# Altium PCB SmartMCU.PcbDoc
Units mil, origin at the board's own origin, x right, y up, seen from the top; angles counter-clockwise.
Board outline 2169 x 1773 mil, 4 copper layers (Top Layer, GND layer, 3.3V layer, Bottom Layer), stack 23.756 mil thick; 88 components, 43 nets, 255 pads, 84 vias.
Unrouted connection lines stored in the file: 21.
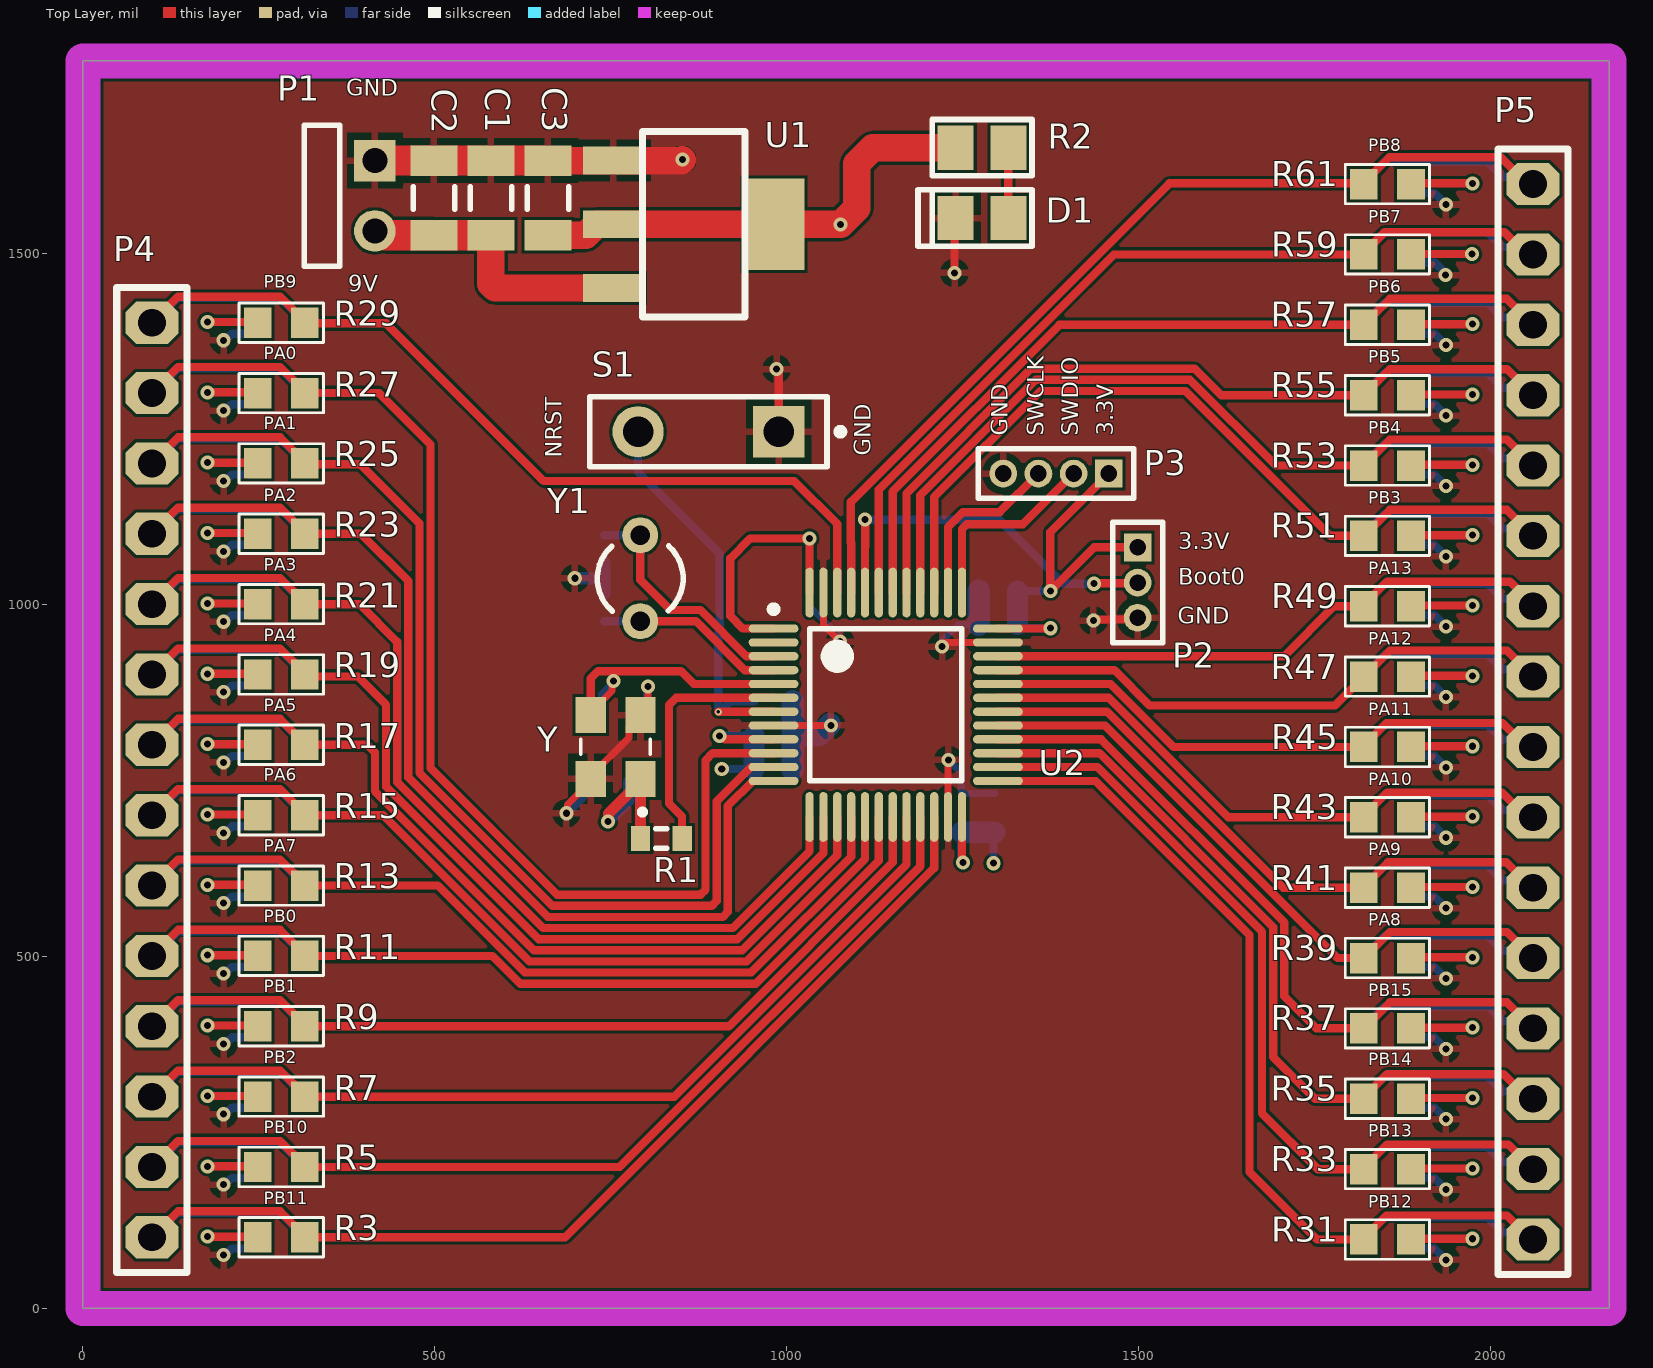
[diagram p0: Top Layer view]
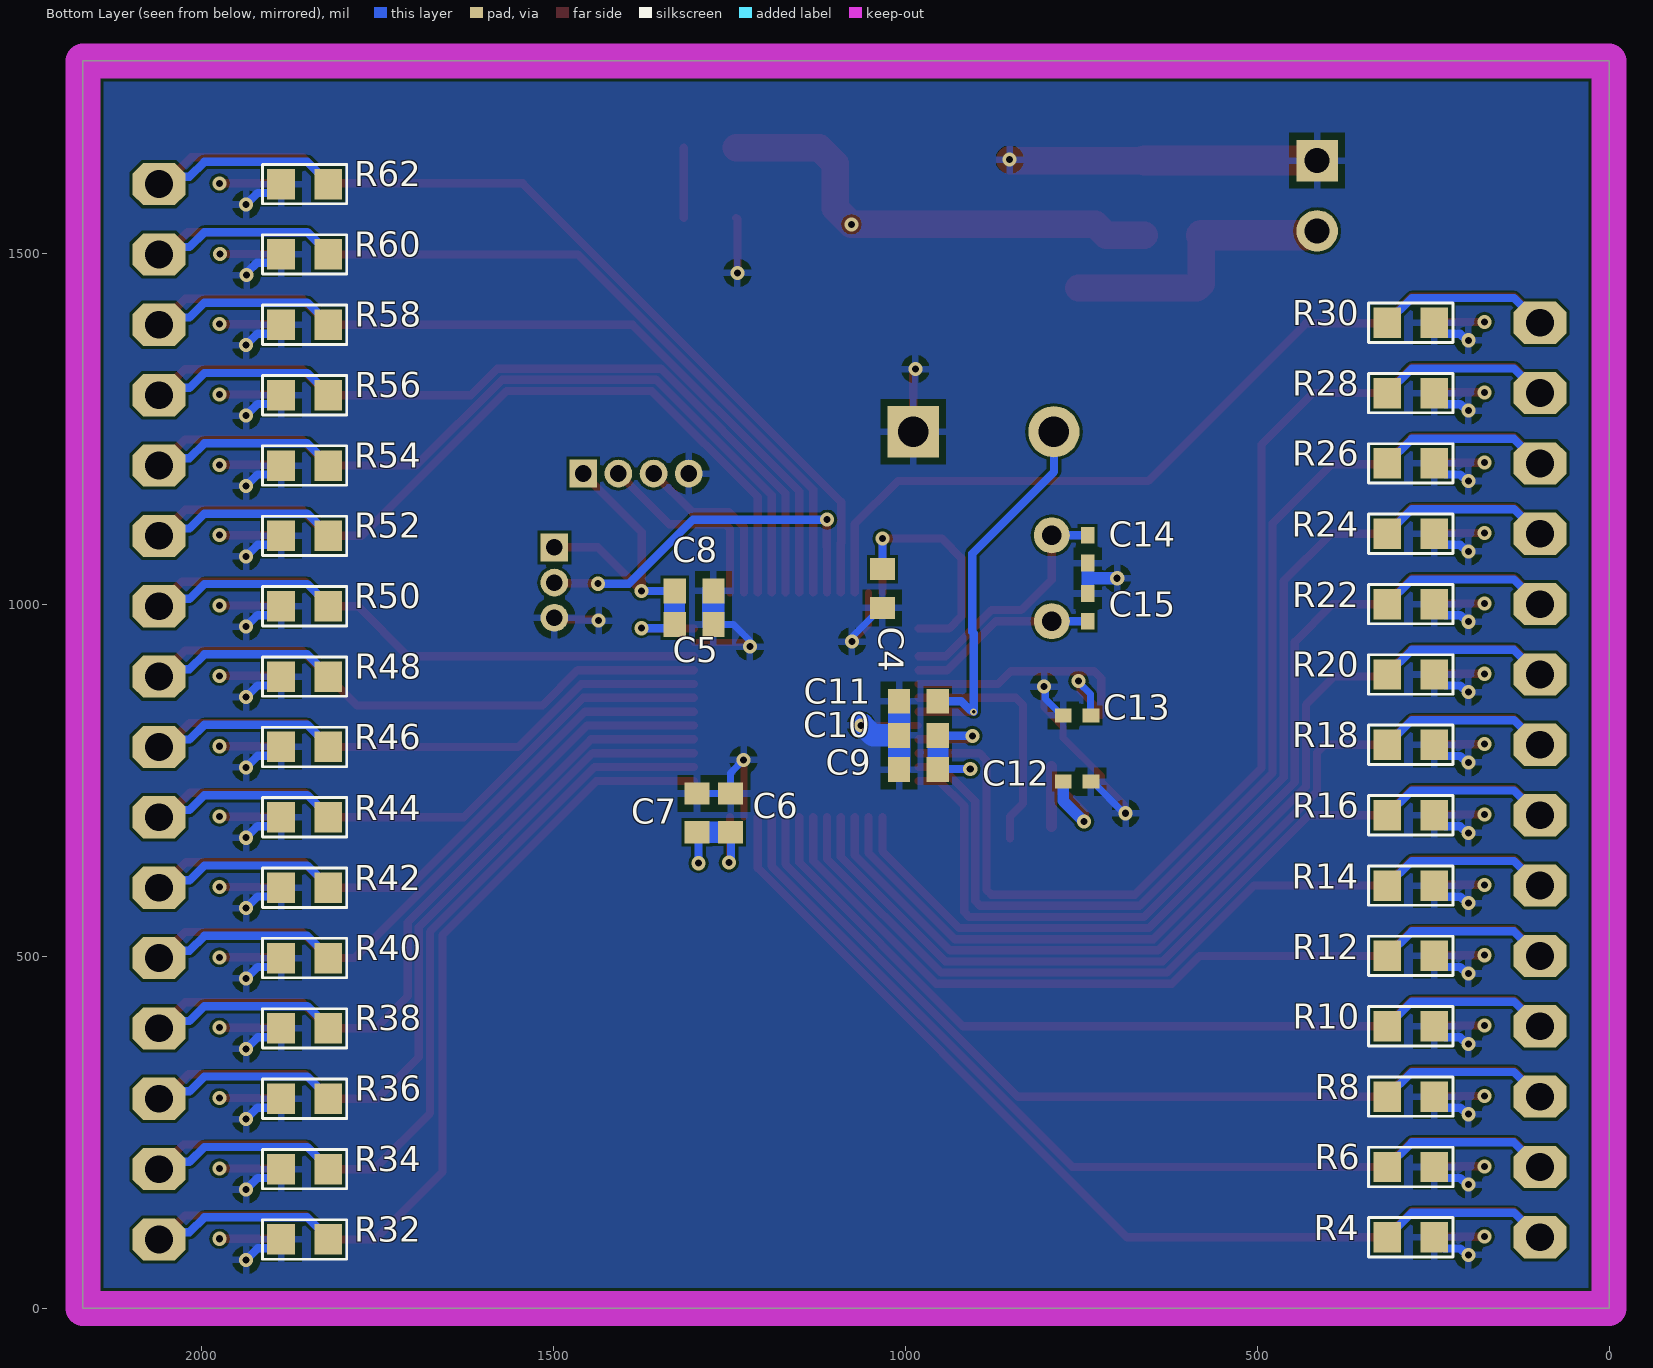
[diagram p1: Bottom Layer view, seen from below]
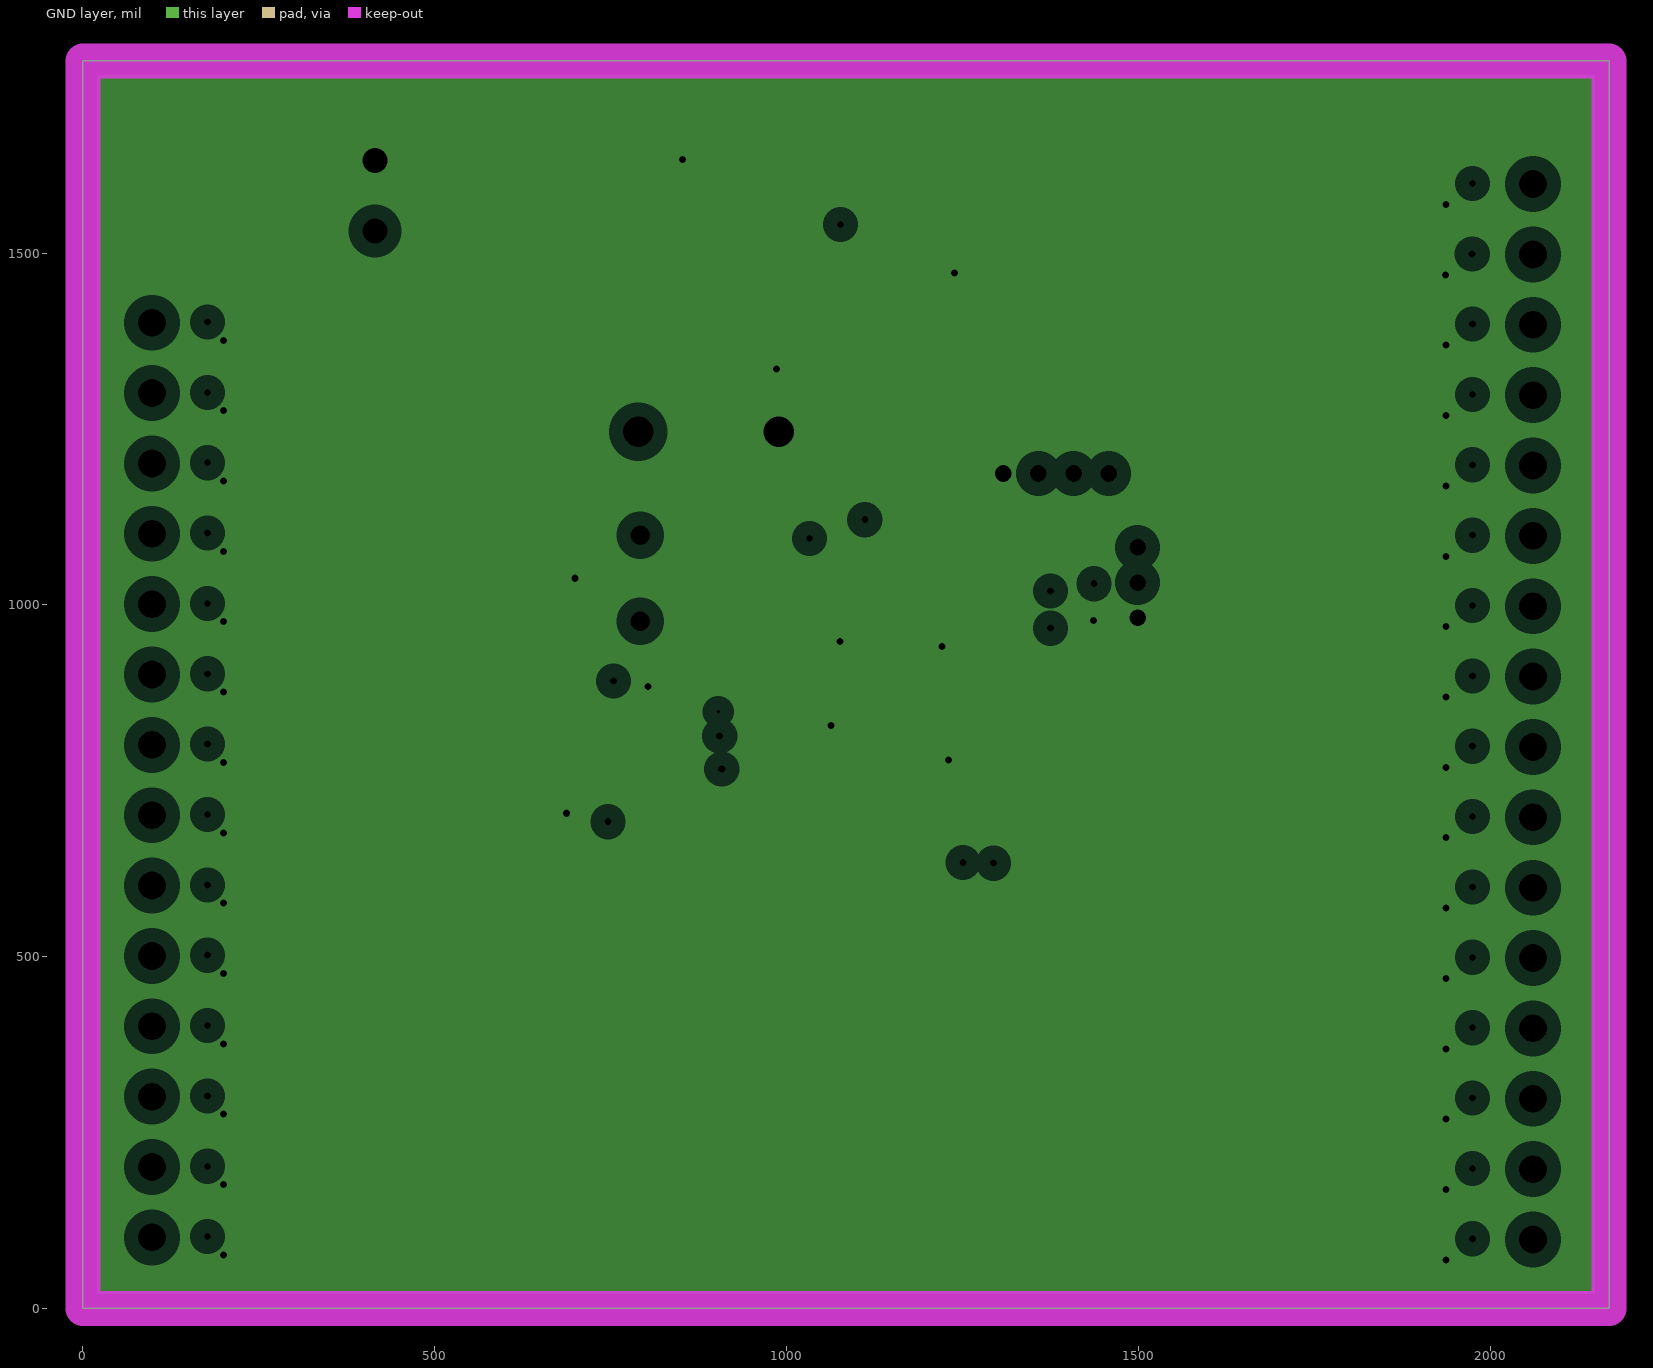
[diagram p2: GND layer, clearances drawn from the general rule]
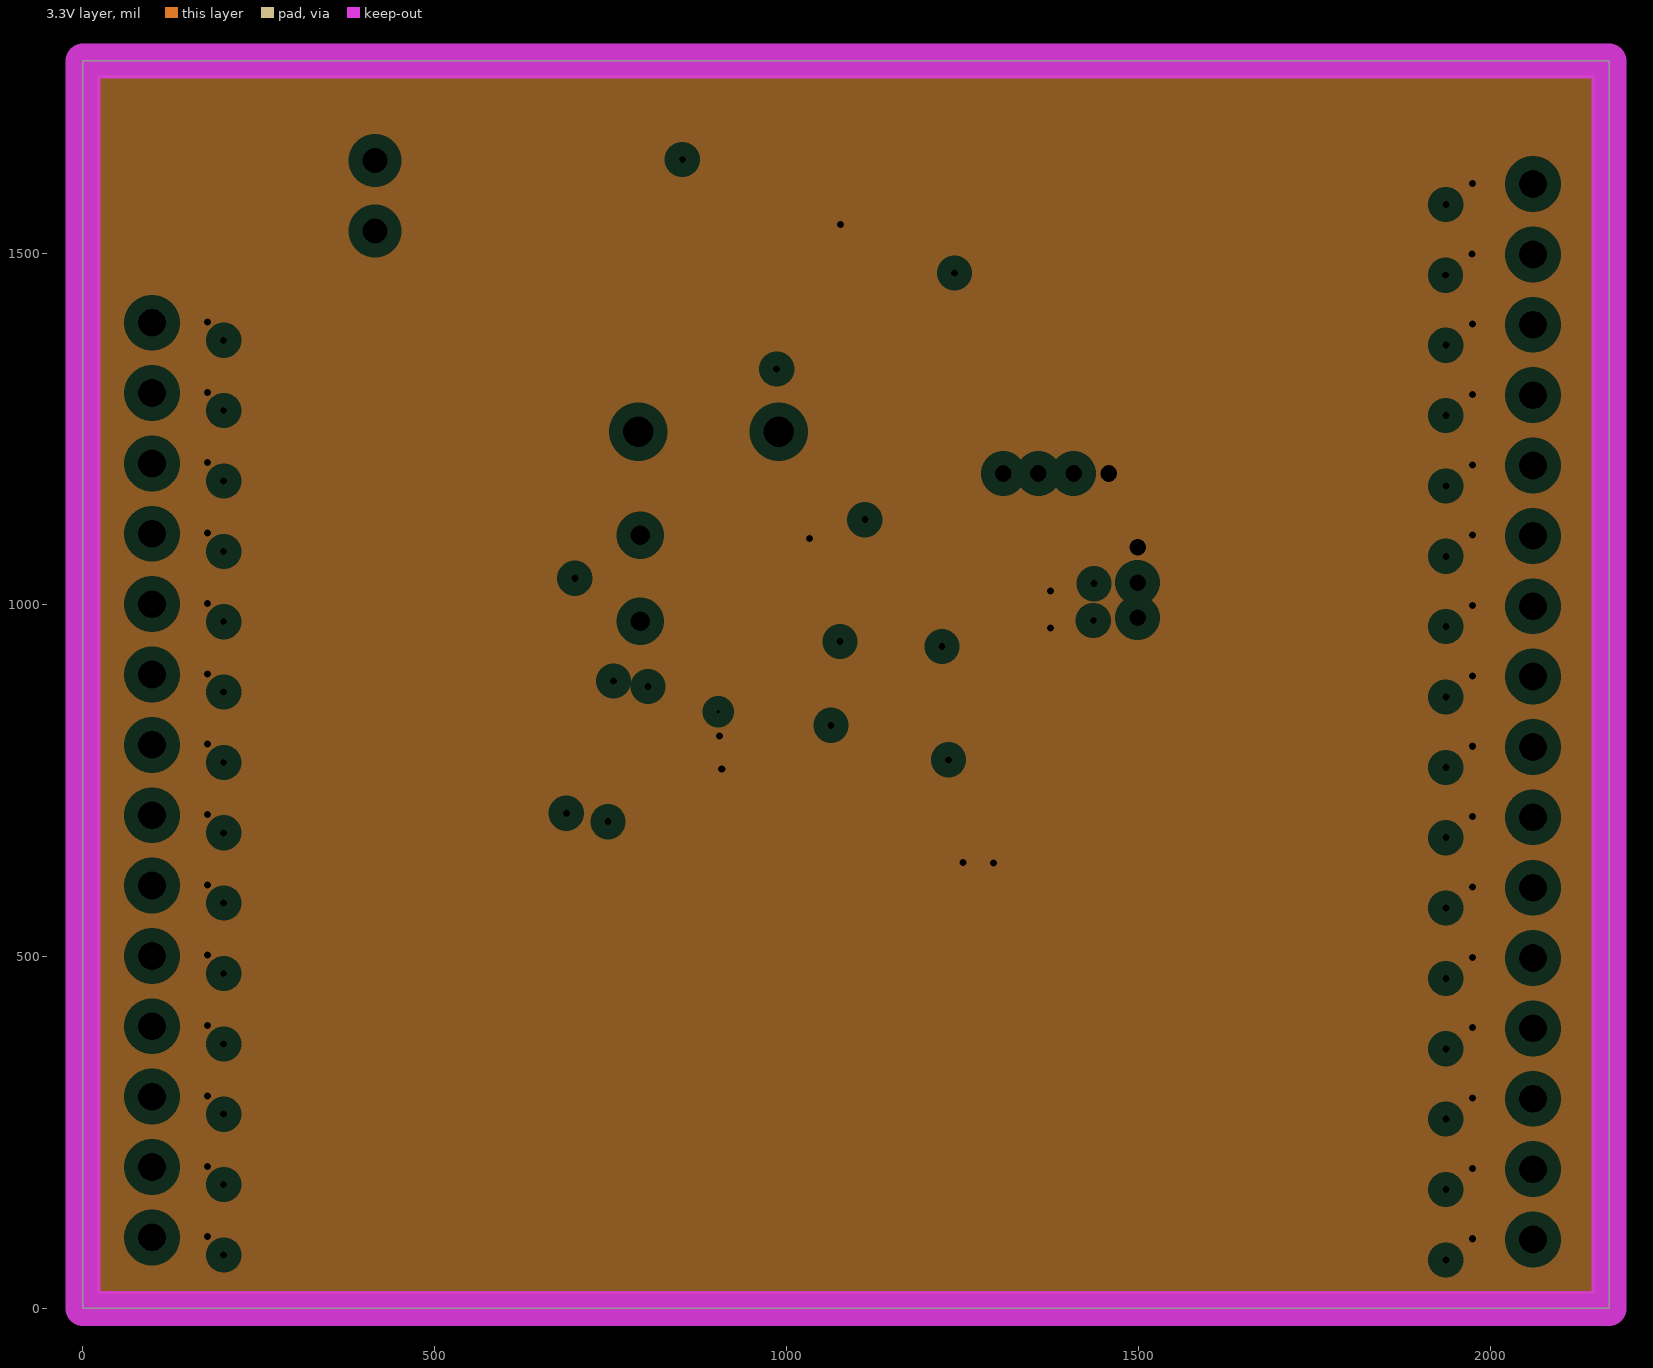
[diagram p3: 3.3V layer, clearances drawn from the general rule]
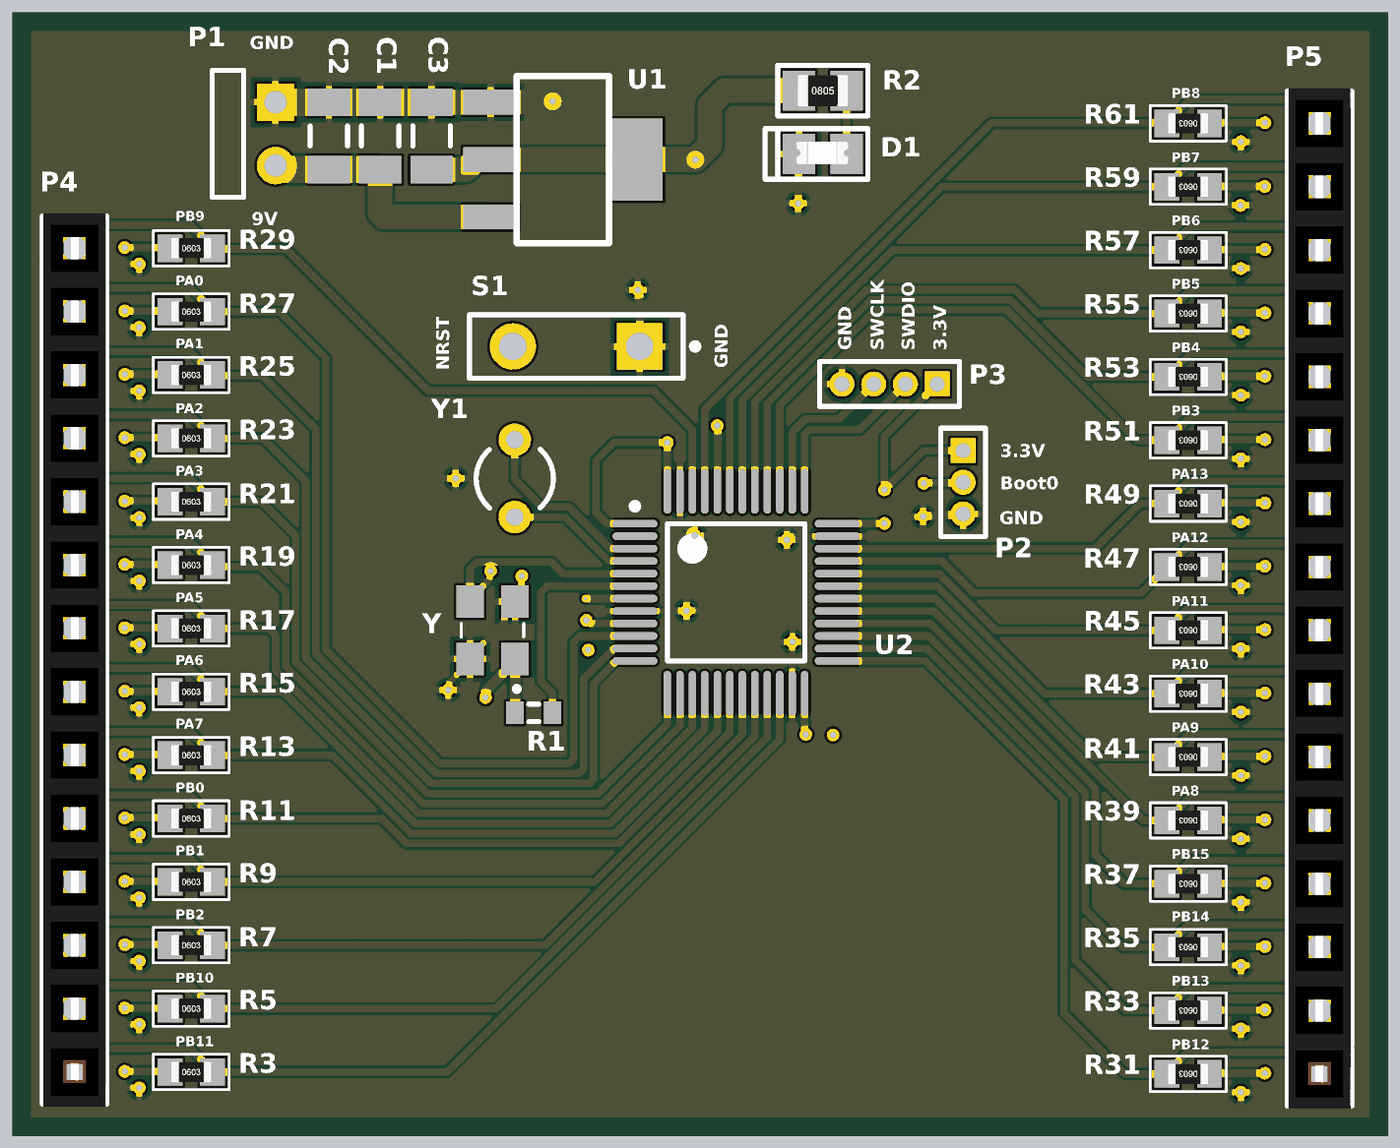
[diagram p4: 3D render of the assembled board from above, using the file's embedded part models]
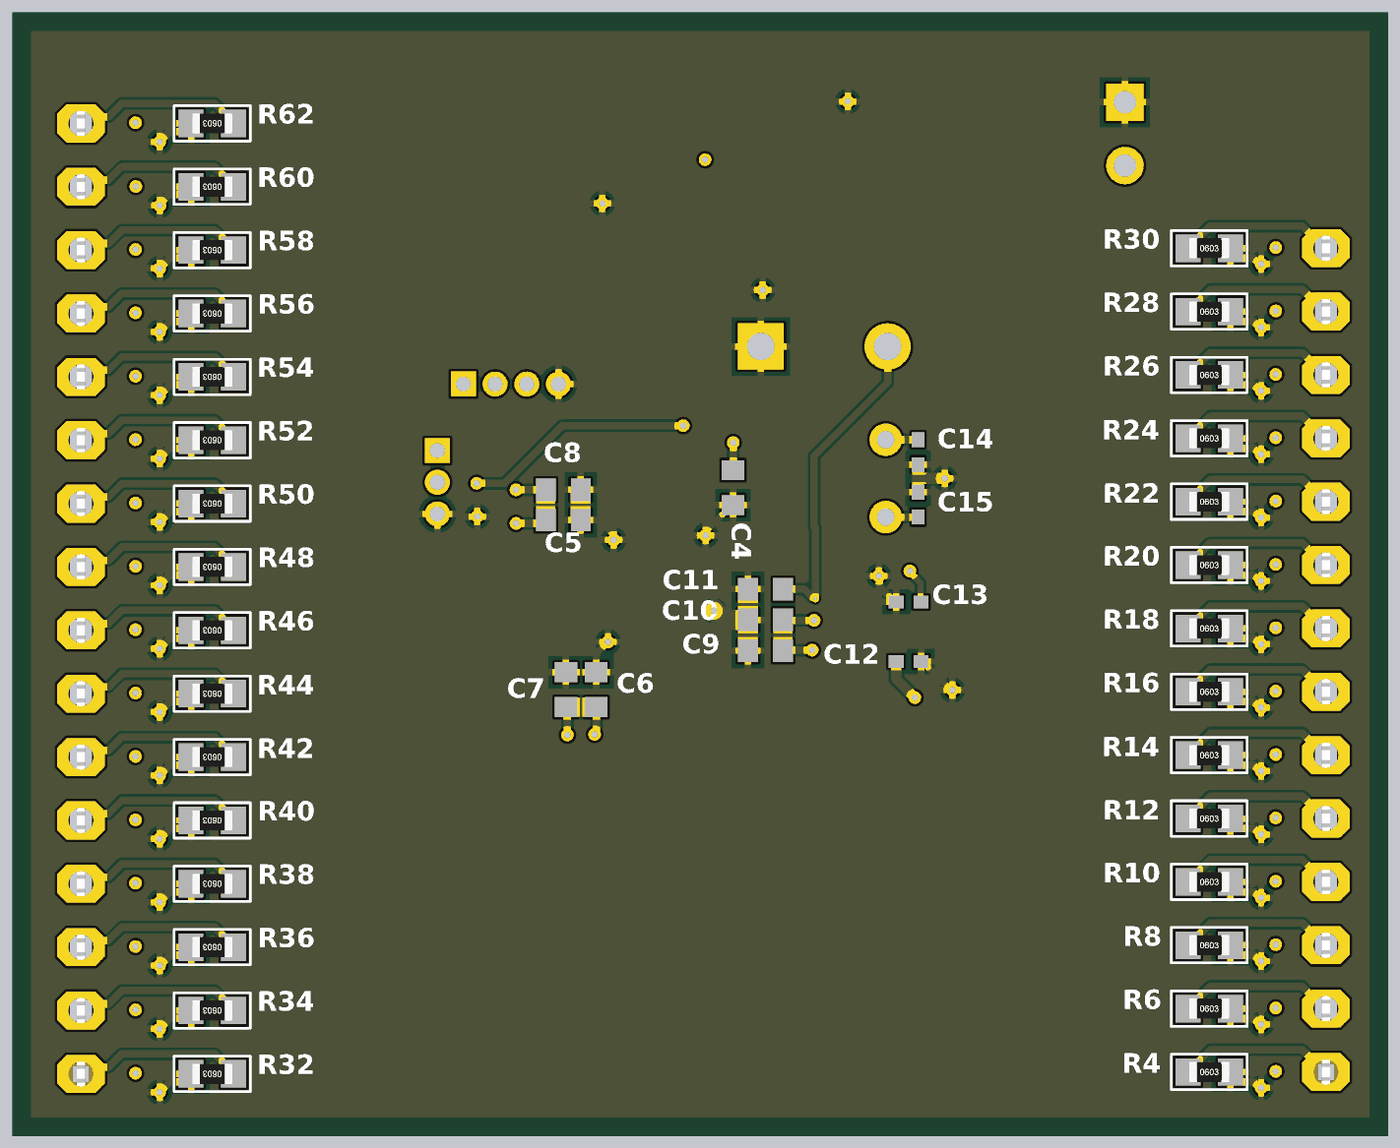
[diagram p5: 3D render of the assembled board from below, using the file's embedded part models]

## Layer stack, top to bottom
Top Solder: solder mask 0.4, Solder Resist, Dk 3.5
Top Layer: signal copper 1.4
Dielectric 2: prepreg 2.8, PP-006, Dk 4.1
GND layer: plane copper 1.378, net GND
Dielectric 1: dielectric 12.6, FR-4, Dk 4.8
3.3V layer: plane copper 1.378, net +3.3V
Dielectric 3: prepreg 2.8, PP-006, Dk 4.1
Bottom Layer: signal copper 1.4
Bottom Solder: solder mask 0.4, Solder Resist, Dk 3.5

## Board outline
0,0 2169,0 2169,1773 0,1773

## Design rules (kind name [scope] priority, off if disabled: settings)
Clearance [All] p1: gap=4 ignorepadtopadclearanceinfootprint=FALSE
MinimumSolderMaskSliver [All] p1: minsoldermaskwidth=2
PlaneClearance [All] p1: clearance=20
PlaneConnect [All] p1: planeconnectstyle=Direct reliefexpansion=20 reliefentries=4 reliefconductorwidth=10 reliefairgap=10
PolygonConnect [All] p1: connectstyle=Relief reliefconductorwidth=10 reliefentries=4 polygonreliefangle="90 Angle" airgapwidth=10
RoutingVias [All] p1: holewidth=5 width=10 viastyle="Through Hole" minholewidth=5 minwidth=10 maxholewidth=28 maxwidth=50
SilkToSilkClearance [All] p1: silktosilkclearance=4
SilkToSolderMaskClearance [IsPad] p1: minsilkscreentomaskgap=1 clearancetoexposedcopper=TRUE
SolderMaskExpansion [All] p1: expansion=4 istentingtop=FALSE
UnRoutedNet [All] p1: checkbadconnections=TRUE
Width [All] p1: maxlimit=50 minlimit=10 preferedwidth=10
24 further rules are at their usual default settings.

## Classes and differential pairs
component class MCU: C4 C5 C6 C7 C8 C9 C10 C11 C12 C13 C14 C15 P2 P3 P4 P5 R1 R3 R4 R5 R6 R7 R8 R9 R10 R11 R12 R13 R14 R15 R16 R17 R18 R19 R20 R21 R22 R23 R24 R25 R26 R27 R28 R29 R30 R31 R32 R33 R34 R35 R36 R37 R38 R39 R40 R41 R42 R43 R44 R45 R46 R47 R48 R49 R50 R51 R52 R53 R54 R55 R56 R57 R58 R59 R60 R61 R62 S1 U2 Y Y1
component class Power_Supply: C1 C2 C3 D1 P1 R2 U1

## Components (designator, comment, footprint, x,y, rotation, side; value= is the part's Value field where it differs from the comment)
C1 "Tantalum Cap" C1206 579.83,1578.29 r270 top value=10uF
C2 "Cap Semi" C1206 498.83,1578.29 r270 top value=100nF
C3 "Tantalum Cap" C1206 660.83,1578.29 r270 top value=10uF
C4 "Cap Semi" 1608[0603] 1032.73,1023.21 r90 bottom value=100nF
C5 "Cap Semi" 1608[0603] 1300.45,972.03 r0 bottom value=100nF
C6 "Cap Semi" 1608[0603] 1248.54,704.31 r270 bottom value=100nF
C7 "Cap Semi" 1608[0603] 1296.27,704.31 r270 bottom value=100nF
C8 "Cap Semi" 1608[0603] 1300.45,1019.76 r0 bottom value=4.7uF
C9 "Cap Semi" 1608[0603] 981.55,765.76 r180 bottom value=10nF
C10 "Cap Semi" 1608[0603] 981.55,814.55 r180 bottom value=1uF
C11 "Cap Semi" 1608[0603] 981.55,862.92 r180 bottom value=100nF
C12 "Cap Semi" 0402 756,748.76 r0 bottom value=10pF
C13 "Cap Semi" 0402 756,842.76 r180 bottom value=10pF
C14 "Cap Semi" 0402 741,1079.1 r90 bottom value=10pF
C15 "Cap Semi" 0402 741,996.43 r270 bottom value=10pF
D1 "LED" MY_LED_0805 1277.83,1552.73 r0 top
P1 "Header 2H" HDR1X2H 414.83,1631.44 r270 top
P2 "MHDR1X3" MHDR1X3 1498.99,1081.63 r270 top
P3 "MHDR1X4" MHDR1X4 1457.99,1186.63 r180 top
P4 "Header 14" MY_FE14 98,751 r90 top
P5 "Header 16" MY_FE16 2061,848 r90 top
R1 "Res3" J1-0603 821.96,667.76 r0 top value=1K
R2 "330" MY_0805 1277.83,1649.73 r0 top
R3 "1K" MY_0603 281.79,101 r0 top
R4 "1K" MY_0603 281.79,101 r180 bottom
R5 "1K" MY_0603 281.79,201 r0 top
R6 "1K" MY_0603 281.79,201 r180 bottom
R7 "1K" MY_0603 281.79,301 r0 top
R8 "1K" MY_0603 281.79,301 r180 bottom
R9 "1K" MY_0603 281.79,401 r0 top
R10 "1K" MY_0603 281.79,401 r180 bottom
R11 "1K" MY_0603 281.79,501 r0 top
R12 "1K" MY_0603 281.79,501 r180 bottom
R13 "1K" MY_0603 281.79,601 r0 top
R14 "1K" MY_0603 281.79,601 r180 bottom
R15 "1K" MY_0603 281.79,701 r0 top
R16 "1K" MY_0603 281.79,701 r180 bottom
R17 "1K" MY_0603 281.79,801 r0 top
R18 "1K" MY_0603 281.79,801 r180 bottom
R19 "1K" MY_0603 281.79,901 r0 top
R20 "1K" MY_0603 281.79,901 r180 bottom
R21 "1K" MY_0603 281.79,1001 r0 top
R22 "1K" MY_0603 281.79,1001 r180 bottom
R23 "1K" MY_0603 281.79,1101 r0 top
R24 "1K" MY_0603 281.79,1101 r180 bottom
R25 "1K" MY_0603 281.79,1201 r0 top
R26 "1K" MY_0603 281.79,1201 r180 bottom
R27 "1K" MY_0603 281.79,1301 r0 top
R28 "1K" MY_0603 281.79,1301 r180 bottom
R29 "1K" MY_0603 281.79,1401 r0 top
R30 "1K" MY_0603 281.79,1401 r180 bottom
R31 "1K" MY_0603 1854,98 r180 top
R32 "1K" MY_0603 1854,98 r0 bottom
R33 "1K" MY_0603 1854,198 r180 top
R34 "1K" MY_0603 1854,198 r0 bottom
R35 "1K" MY_0603 1854,298 r180 top
R36 "1K" MY_0603 1854,298 r0 bottom
R37 "1K" MY_0603 1854,398 r180 top
R38 "1K" MY_0603 1854,398 r0 bottom
R39 "1K" MY_0603 1854,498 r180 top
R40 "1K" MY_0603 1854,498 r0 bottom
R41 "1K" MY_0603 1854,598 r180 top
R42 "1K" MY_0603 1854,598 r0 bottom
R43 "1K" MY_0603 1854,698 r180 top
R44 "1K" MY_0603 1854,698 r0 bottom
R45 "1K" MY_0603 1854,798 r180 top
R46 "1K" MY_0603 1854,798 r0 bottom
R47 "1K" MY_0603 1854,898 r180 top
R48 "1K" MY_0603 1854,898 r0 bottom
R49 "1K" MY_0603 1854,998 r180 top
R50 "1K" MY_0603 1854,998 r0 bottom
R51 "1K" MY_0603 1854,1098 r180 top
R52 "1K" MY_0603 1854,1098 r0 bottom
R53 "1K" MY_0603 1854,1198 r180 top
R54 "1K" MY_0603 1854,1198 r0 bottom
R55 "1K" MY_0603 1854,1298 r180 top
R56 "1K" MY_0603 1854,1298 r0 bottom
R57 "1K" MY_0603 1854,1398 r180 top
R58 "1K" MY_0603 1854,1398 r0 bottom
R59 "1K" MY_0603 1854,1498 r180 top
R60 "1K" MY_0603 1854,1498 r0 bottom
R61 "1K" MY_0603 1854,1598 r180 top
R62 "1K" MY_0603 1854,1598 r0 bottom
S1 "SW-PB" SPST-2 889,1246 r180 top
U1 "" "4-Pin SOT" 868,1409 r270 top
U2 "STM32F103CBT6" STM-LQFP48_N 1141,858 r0 top
Y "ECS-80-12-33-JGN-TR" XTAL_ECS-240-8-33-AGN-TR 757,798.06 r90 top
Y1 "XTAL" R38 792.01,1037.76 r0 top

## Footprints (in the part's own frame and the unit in brackets; to place one, negate y for a bottom-side part, rotate by r counter-clockwise, add the part's x,y. Pads: shape width x height; smd on the part's side, far side on the other; paste and mask are expansions set on the pad)
"4-Pin SOT" [mm]
  rect 1x2.2 smd: 0(-1.05,-2.9) 1(-5.65,-2.9) 2(-3.35,-2.9)
  rect 3.3x2.2 smd: 2(-3.35,2.9)
  silkscreen extent -6.7,-1.85 0,1.85
0402 [mm] "Chip Capacitor, Body 1.0x0.5mm, IPC High Density"
  rect 0.6x0.5 smd: 1(-0.5,0) 2(0.5,0)
  body extent -0.55,-0.3 0.55,0.3, height 1.3
1608[0603] [mm] "Chip Capacitor, Body 1.6x0.8mm, IPC High Density"
  rect 0.8x0.9 smd: 1(-0.7,0) 2(0.7,0)
  body extent -0.87,-0.48 0.87,0.48, height 1.3
C1206 [mm] "Chip Capacitor, Body 3.2x1.6mm, IPC High Density"
  rect 1.1x1.7 smd: 1(-1.35,0) 2(1.35,0)
  silkscreen extent -0.4,-0.75 0.4,0.75, body extent -1.7,-0.9 1.7,0.9, height 1.3
HDR1X2H [mm] "Connector; Header; 2 Position; Right Angle"
  rect 1.5x1.5 hole 0.9: 1(0,0)
  round 1.5 hole 0.9: 2(2.54,0)
  silkscreen extent -1.27,-2.54 3.81,-1.27
J1-0603 [mm] "Chip Resistor, Body 1.6x0.8mm, IPC High Density"
  rect 0.7x0.9 smd: 1(-0.75,0) 2(0.75,0)
  silkscreen extent -0.2,-0.35 0.2,0.35, body extent -0.85,-0.48 0.85,0.48, height 0.9
MHDR1X3 [mm] "Connector; Header; 3 Position"
  rect 1x1 hole 0.6: 1(0,0)
  round 1 hole 0.6: 2(1.27,0) 3(2.54,0)
  silkscreen extent -0.9,-0.9 3.44,0.9
MHDR1X4 [mm] "Connector; Header; 4 Position"
  rect 1x1 hole 0.6: 1(0,0)
  round 1 hole 0.6: 2(1.27,0) 3(2.54,0) 4(3.81,0)
  silkscreen extent -0.9,-0.9 4.71,0.9
MY_0603 [mm]
  rect 1x1.1 smd: 1(-0.85,0) 2(0.85,0)
  silkscreen extent -1.52,-0.71 1.52,0.71, body extent -0.8,-0.4 0.8,0.4, height 0.44
MY_0805 [mm]
  rect 1.3x1.6 smd: 1(-0.95,0) 2(0.95,0)
  silkscreen extent -1.8,-1.02 1.8,1.02, body extent -1,-0.62 1,0.63, height 0.59
MY_FE14 [mil]
  oct 60x75 hole 39.37: 1(-650,0) 2(-550,0) 3(-450,0) 4(-350,0) 5(-250,0) 6(-150,0) 7(-50,0) 8(50,0) 9(150,0) 10(250,0) 11(350,0) 12(450,0) 13(550,0) 14(650,0)
  silkscreen extent -700,-50 700,50, body extent -705,-49 705,49, height 335
MY_FE16 [mil]
  oct 60x75 hole 39.37: 1(-750,0) 2(-650,0) 3(-550,0) 4(-450,0) 5(-350,0) 6(-250,0) 7(-150,0) 8(-50,0) 9(50,0) 10(150,0) 11(250,0) 12(350,0) 13(450,0) 14(550,0) 15(650,0) 16(750,0)
  silkscreen extent -800,-50 800,50, body extent -805,-49 805,49, height 335
MY_LED_0805 [mm]
  rect 1.3x1.6 smd: A(0.95,-0.076) K(-0.95,-0.076)
  silkscreen extent -2.31,-1.09 1.8,0.94, body extent -1.06,-0.48 1.01,0.42, height 0.86
R38 [mm] "Crystal, Thru-Hole; 2 Leads; Body 3.1 x 8.2 mm (Dia.xH)"
  round 1.3 hole 0.7: 1(0,1.55) 2(0,-1.55)
  silkscreen extent -1.55,-1.19 1.55,1.17
SPST-2 [mm] "Switch; 2 Leads"
  rect 1.85x1.85 hole 1.1: 1(-2.54,0)
  round 1.85 hole 1.1: 2(2.54,0)
  silkscreen extent -4.89,-1.27 4.28,1.27
STM-LQFP48_N [mm] "QFP, 48-Leads, Body 7x7mm, Pitch 0.5mm, IPC Medium Density"
  oval 1.8x0.3 smd: 1(-4.05,2.75) 2(-4.05,2.25) 3(-4.05,1.75) 4(-4.05,1.25) 5(-4.05,0.75) 6(-4.05,0.25) 7(-4.05,-0.25) 8(-4.05,-0.75) 9(-4.05,-1.25) 10(-4.05,-1.75) 11(-4.05,-2.25) 12(-4.05,-2.75) 25(4.05,-2.75) 26(4.05,-2.25) 27(4.05,-1.75) 28(4.05,-1.25) 29(4.05,-0.75) 30(4.05,-0.25) 31(4.05,0.25) 32(4.05,0.75) 33(4.05,1.25) 34(4.05,1.75) 35(4.05,2.25) 36(4.05,2.75)
  oval 0.3x1.8 smd: 13(-2.75,-4.05) 14(-2.25,-4.05) 15(-1.75,-4.05) 16(-1.25,-4.05) 17(-0.75,-4.05) 18(-0.25,-4.05) 19(0.25,-4.05) 20(0.75,-4.05) 21(1.25,-4.05) 22(1.75,-4.05) 23(2.25,-4.05) 24(2.75,-4.05) 37(2.75,4.05) 38(2.25,4.05) 39(1.75,4.05) 40(1.25,4.05) 41(0.75,4.05) 42(0.25,4.05) 43(-0.25,4.05) 44(-0.75,4.05) 45(-1.25,4.05) 46(-1.75,4.05) 47(-2.25,4.05) 48(-2.75,4.05)
  silkscreen extent -4.17,-2.75 2.75,3.57
XTAL_ECS-240-8-33-AGN-TR [mm]
  rect 1.3x1.1 smd: 1(-1.15,-0.9) 2(1.15,-0.9) 3(1.15,0.9) 4(-1.15,0.9)
  silkscreen extent -2.45,-1.25 0.27,1.25

## Part data
C1 C3: library part "Cap Semi", "Capacitor (Semiconductor SIM Model)", LatestRevisionDate=29-May-2009, LatestRevisionNote="IPC-7351 Footprint Added.", PackageDescription="Chip Capacitor", PackageReference=C1206, Published=8-Jun-2000, Publisher="Altium Limited"
C2 C4 C5 C6 C7 C8 C9 C10 C11 C12 C13 C14 C15: "Capacitor (Semiconductor SIM Model)", LatestRevisionDate=29-May-2009, LatestRevisionNote="IPC-7351 Footprint Added.", PackageDescription="Chip Capacitor", PackageReference=C1206, Published=8-Jun-2000, Publisher="Altium Limited"
D1: "Typical INFRARED GaAs LED", ASiD Part Number=LED-AS
P1: "Header, 2-Pin, Right Angle", LatestRevisionDate=17-Jul-2002, LatestRevisionNote="Re-released for DXP Platform.", Publisher="Altium Limited"
P2: "Header, 3-Pin", LatestRevisionDate=17-Jul-2002, LatestRevisionNote="Re-released for DXP Platform.", Publisher="Altium Limited"
P3: "Header, 4-Pin", LatestRevisionDate=17-Jul-2002, LatestRevisionNote="Re-released for DXP Platform.", Publisher="Altium Limited"
P4: "Header, 14-Pin", ASiD Part Number="Header 14-AS"
P5: "Header, 16-Pin", ASiD Part Number="Header 16-AS"
R1: "Resistor", LatestRevisionDate=29-May-2009, LatestRevisionNote="IPC-7351 Footprint Added.", PackageDescription="Chip Resistor", PackageReference=J1-0603, Published=8-Jun-2000, Publisher="Altium Limited"
R2 R3 R4 R5 R6 R7 R8 R9 R10 R11 R12 R13 R14 R15 R16 R17 R18 R19 R20 R21 R22 R23 R24 R25 R26 R27 R28 R29 R30 R31 R32 R33 R34 R35 R36 R37 R38 R39 R40 R41 R42 R43 R44 R45 R46 R47 R48 R49 R50 R51 R52 R53 R54 R55 R56 R57 R58 R59 R60 R61 R62: library part Res, "Standard resistor", ASiD Part Number=Res-AS
S1: "Switch", LatestRevisionDate=17-Jul-2002, LatestRevisionNote="Re-released for DXP Platform.", PackageDescription="Switch; 2 Leads", PackageReference=SPST-2, Published=24-Mar-1999, Publisher="Altium Limited"
U1: library part lm1117, "The LM1117 is a low dropout voltage regulator with a / dropout of 1.2 V at 800 mA of load current. / The LM1117 is available in an adjustable version, / which can set the output voltage from 1.25 to 13.8 V / with only two external resistors. In addition, it is / available in five fixed voltages, 1.8 V, 2.5 V, 3.3 V, / and 5 V. / The LM1117 offers current limiting and thermal / shutdown. Its circuit includes a Zener trimmed / bandgap reference to assure output voltage accuracy / to within ±1%. / A minimum of 10-µF tantalum capacitor is required at / the output to improve the transient response and / stability.", output voltag=3.3V, ComponentLink1Description=datasheet, ComponentLink1URL=https://www.ti.com/lit/gpn/lm1117
U2: "ARM Cortex-M3 32-bit MCU, 128 KB Flash, 20 KB Internal RAM, 37 I/Os, 48-pin LQFP, -40 to 85 degC, Tray", I/Os (High Current)=37, Operating Frequency(F) (Processor speed) (MHz)=72, Supplier Part Number 1=497-6288-ND, Supply Voltage(Vcc) min (V)=2, A/D Converter="2x12-bit (10 Channel)", ComponentLink1Description="Manufacturer URL", ComponentLink1URL=http://www.st.com/web/en/home.html, ComponentLink2Description=Datasheet, ComponentLink2URL=http://www.st.com/st-web-ui/static/active/en/resource/technical/document/datasheet/CD00161566.pdf, ComponentLink3Description="Package Specification", ComponentLink3URL=http://www.st.com/st-web-ui/static/active/en/resource/technical/document/datasheet/DM00058181.pdf, Core="ARM Cortex-M3", DatasheetVersion="Rev. 16", FLASH Size (Prog) (kB)=128, Internal RAM Size (kB)=20, Mounting Technology="Surface Mount", PackageDescription="48-Pin Low Profile Quad Flat Package, 7 x 7 mm Body, 0.5 mm Pitch", PackageReference=LQFP48, PackageVersion="Rev. 6, 06/2013", Packing=Tray, PartNumber=STM32F103CBT6, Supplier 1=Digi-Key, Supplier 2=Farnell, Supplier 3=Newark, Supplier 4=Newark, Supplier 5=Mouser, Supplier Part Number 2=1606327, Supplier Part Number 3=11N8296, Supplier Part Number 4=57P1214, Supplier Part Number 5=511-STM32F103CBT6
Y: "8MHz Â±20ppm Crystal 12pF 400 Ohms 4-SMD, No Lead", Package="SMD-4 ECS International", Availability=Warning, BuyPart=https://www.snapeda.com/parts/ECS-80-12-33-JGN-TR/ECS%20Inc./view-part/4477300/?ref=eda, MF="ECS Inc.", Mouser-Purchase-URL=https://snapeda.com/shop?store=Mouser&id=4477300, MP=ECS-80-12-33-JGN-TR, Price=None, SnapEDA_Link=https://www.snapeda.com/parts/ECS-80-12-33-JGN-TR/ECS%20Inc./view-part/4477300/?ref=snap
Y1: "Crystal Oscillator", LatestRevisionDate=17-Jul-2002, LatestRevisionNote="Re-released for DXP Platform.", PackageDescription="Crystal, Thru-Hole; 2 Leads; Body 3.1 x 8.2 mm (Dia.xH)", PackageReference=R38, Published=8-Jun-2000, Publisher="Altium Limited"

## Via types
v1: diameter 20, hole 10, Top Layer to Bottom Layer, 83 vias
v2: diameter 10, hole 5, Top Layer to Bottom Layer, 1 vias

## Nets (pads, with @x,y where several pads share a name; then routed paths per layer and width w, separated by ;. In a path a pad name is that pad's centre, name@x,y a point inside that pad or via, vN(x,y) a via of type N, cw(c..) or ccw(c..) an arc to the next point about the centre after c; other vN are vias at no path point)
32kHz_01: C14.2 U2.3 Y1.1 | length 348.7
  Top Layer w11.8: Y1.1 792.01,1035.76 835.23,992.54 877.58,992.54 943.22,926.9 U2.3@981.55,926.9
  Bottom Layer w11.8: C14.2 Y1.1
32kHz_02: C15.2 U2.4 Y1.2 | length 269.4
  Top Layer w11.8: Y1.2 871.03,976.74 940.56,907.21 U2.4
  Bottom Layer w11.8: C15.2 Y1.2
+3.3V: C3.2 C4.2 C5.2 C6.2 C7.2 C8.2 C9.2 C10.2 P2.1 P3.1 R2.1 R3.1 R5.1 R7.1 R9.1 R11.1 R13.1 R15.1 R17.1 R19.1 R21.1 R23.1 R25.1 R27.1 R29.1 R31.1 R33.1 R35.1 R37.1 R39.1 R41.1 R43.1 R45.1 R47.1 R49.1 R51.1 R53.1 R55.1 R57.1 R59.1 R61.1 U1.2 U2.1 U2.9 U2.24 U2.36 U2.48 | length 4431.2
  Top Layer w11.8: v1(177,102) 247.32,102 R3.1 ; v1(177,202) R5.1@247.32,202 ; v1(177,302) R7.1@247.32,302 ; v1(177,402) R9.1@247.32,402 ; v1(177,502) R11.1@247.32,502 ; v1(177,602) R13.1@247.32,602 ; v1(177,702) R15.1@247.32,702 ; v1(177,802) R17.1@247.32,802 ; v1(177,902) R19.1@247.32,902 ; v1(177,1002) R21.1@247.32,1002 ; v1(177,1102) R23.1@247.32,1102 ; v1(177,1202) R25.1@247.32,1202 ; v1(177,1302) R27.1@247.32,1302 ; v1(177,1402) R29.1@247.32,1402 ; v1(905.01,813.76) 907.23,813.76 912.2,808.79 U2.9 ; U2.1 937.73,966.27 920,984 920,1066 948.25,1094.25 v1(1032.52,1094.25) 1032.73,1094.04 U2.48@1032.73,1017.45 ; U2.24 1249.27,637.72 1251.01,635.98 v1(1251.01,633.76) ; U2.36@1300.45,966.27 1374.51,966.27 v1(1375.01,966.76) ; P3.1 1375.01,1103.65 v1(1375.01,1019.76) 1436.87,1081.63 P2.1 ; R61.1 1888.46,1599 v1(1975,1599) ; R59.1@1887.96,1498.5 v1(1974.5,1498.5) ; R31.1@1888.46,99 v1(1975,99) ; R33.1@1888.46,199 v1(1975,199) ; R35.1@1888.46,299 v1(1975,299) ; R37.1@1888.46,399 v1(1975,399) ; R39.1@1888.46,499 v1(1975,499) ; R41.1@1888.46,599 v1(1975,599) ; R43.1@1888.46,699 v1(1975,699) ; R45.1@1888.46,799 v1(1975,799) ; R47.1@1888.46,899 v1(1975,899) ; R49.1@1888.46,999 v1(1975,999) ; R51.1@1888.46,1099 v1(1975,1099) ; R53.1@1888.46,1199 v1(1975,1199) ; R55.1@1888.46,1299 v1(1975,1299) ; R57.1@1888.46,1399 v1(1975,1399)
  Top Layer w39: C3.2 714.46,1525.14 730.2,1540.89 753.83,1540.89 982.17,1540.89 1076.67,1540.89 v1(1076.83,1540.73) 1099.83,1563.73 1099.83,1626.89 1122.67,1649.73 R2.1
  Bottom Layer w11.8: v1(905.01,813.76) 953.2,813.76 C10.2 ; v1(907.9,766.76) 952.99,766.76 C9.2 ; v1(1032.52,1094.25) 1032.52,1050.98 C4.2 ; C6.2 1248.01,676.23 1248.01,638.98 1251.01,635.98 v1(1251.01,633.76) ; v1(1294.01,632.76) 1294.01,674.5 C7.2 ; C5.2 1333.28,966.76 v1(1375.01,966.76) ; C8.2 v1(1375.01,1019.76)
  Bottom Layer w30: C9.2 C10.2 ; C6.2 C7.2 ; C5.2 C8.2
+9V: C1.2 C2.2 P1.2 U1.0 | length 412.4
  Top Layer w32: P1.2@419.83,1531.44 P1.2@422.98,1528.29
  Top Layer w39: C1.2 579.83,1456.2 585.68,1450.34 U1.0
  Top Layer w43: P1.2@419.83,1531.44 424.17,1531.44 430.32,1525.3 498.67,1525.3 C2.2 C1.2
Boot0: P2.2 U2.44 | length 530.2
  Top Layer w11.8: v1(1111.26,1121) 1112,1120.26 1112,1082.36 1111.47,1081.83 U2.44 ; v1(1437,1030) 1437.81,1030.81 1498.18,1030.81 P2.2
  Bottom Layer w11.8: v1(1111.26,1121) 1301.91,1121 1392.91,1030 v1(1437,1030)
GND: C1.1 C2.1 C3.1 C4.1 C5.1 C6.1 C7.1 C8.1 C9.1 C10.1 C11.1 C12.1 C13.1 C14.1 C15.1 D1.K P1.1 P2.3 P3.4 R4.2 R6.2 R8.2 R10.2 R12.2 R14.2 R16.2 R18.2 R20.2 R22.2 R24.2 R26.2 R28.2 R30.2 R32.2 R34.2 R36.2 R38.2 R40.2 R42.2 R44.2 R46.2 R48.2 R50.2 R52.2 R54.2 R56.2 R58.2 R60.2 R62.2 S1.1 U1.1 U2.8 U2.23 U2.35 U2.47 Y.2 Y.4 | length 3647.7
  Top Layer w10: v1(687.01,703.76) 688.92,705.68 688.92,716.2 721.57,748.85 Y.4 721.57,756.72 775.78,810.94 775.78,826.68 Y.2 803.01,853.91 v1(803.01,883.76) ; U2.8 981.7,828.62 1062.86,828.62 v1(1063.01,828.76) ; U2.47 1052.42,971.35 v1(1076.01,947.76) ; v1(1221.01,940.68) 1226.91,946.58 U2.35 ; U2.23 1229.8,698.76 1229.8,779.55 v1(1230.01,779.76)
  Top Layer w11.8: v1(986,1335) 986,1332.78 989,1329.78 S1.1 ; v1(1238.83,1471.73) 1238.83,1548.13 D1.K ; v1(1435.99,977.63) 1437.56,979.2 1496.56,979.2 P2.3
  Top Layer w39: C3.1 U1.1 850.54,1631.44 v1(851.83,1632.73)
  Top Layer w43: P1.1 C2.1 C1.1 C3.1
  Bottom Layer w10: v1(687.01,703.76) 689.35,703.76 734.35,748.76 C12.1 ; C13.1 777.65,842.76 801.01,866.12 801.01,881.76 v1(803.01,883.76) ; C4.1 1034.7,995.65 1074.09,956.26 1074.09,949.68 v1(1076.01,947.76) ; v1(1221.01,940.68) 1221.01,948.76 1244.28,972.03 C5.1 ; v1(1230.01,779.76) 1248.54,761.24 C6.1 C7.1
  Bottom Layer w11.8: v1(200,76) 202.22,76 211.47,85.25 234.54,85.25 248.33,99.03 R4.2 ; v1@202.22,176 211.47,185.25 232.57,185.25 R6.2 ; v1@202.22,276 211.47,285.25 232.57,285.25 R8.2 ; v1@202.22,376 211.47,385.25 232.57,385.25 R10.2 ; v1@202.22,476 211.47,485.25 232.57,485.25 R12.2 ; v1@202.22,576 211.47,585.25 232.57,585.25 R14.2 ; v1@202.22,676 211.47,685.25 232.57,685.25 R16.2 ; v1@202.22,776 211.47,785.25 232.57,785.25 R18.2 ; v1@202.22,876 211.47,885.25 232.57,885.25 R20.2 ; v1@202.22,976 211.47,985.25 232.57,985.25 R22.2 ; v1@202.22,1076 211.47,1085.25 232.57,1085.25 R24.2 ; v1@202.22,1176 211.47,1185.25 232.57,1185.25 R26.2 ; v1@202.22,1276 211.47,1285.25 232.57,1285.25 R28.2 ; v1@202.22,1376 211.47,1385.25 232.57,1385.25 R30.2 ; R32.2@1887.46,97.02 1899.14,85.34 1920.66,85.34 v1(1937,69) ; R34.2@1887.46,197.02 1899.14,185.34 1920.66,185.34 v1(1937,169) ; R36.2@1887.46,297.02 1899.14,285.34 1920.66,285.34 v1(1937,269) ; R38.2@1887.46,397.02 1899.14,385.34 1920.66,385.34 v1(1937,369) ; R40.2@1887.46,497.02 1899.14,485.34 1920.66,485.34 v1(1937,469) ; R42.2@1887.46,597.02 1899.14,585.34 1920.66,585.34 v1(1937,569) ; R44.2@1887.46,697.02 1899.14,685.34 1920.66,685.34 v1(1937,669) ; R46.2@1887.46,797.02 1899.14,785.34 1920.66,785.34 v1(1937,769) ; R48.2@1887.46,897.02 1899.14,885.34 1920.66,885.34 v1(1937,869) ; R50.2@1887.46,997.02 1899.14,985.34 1920.66,985.34 v1(1937,969) ; R52.2@1887.46,1097.02 1899.14,1085.34 1920.66,1085.34 v1(1937,1069) ; R54.2@1887.46,1197.02 1899.14,1185.34 1920.66,1185.34 v1(1937,1169) ; R56.2@1887.46,1297.02 1899.14,1285.34 1920.66,1285.34 v1(1937,1269) ; R58.2@1887.46,1397.02 1899.14,1385.34 1920.66,1385.34 v1(1937,1369) ; R60.2@1887.46,1497.88 1899.14,1486.21 1921.65,1486.21 1934.93,1472.92 1934.93,1470.07 v1(1936.5,1468.5) ; R62.2@1887.46,1597.02 1899.14,1585.34 1920.66,1585.34 v1(1937,1569)
  Bottom Layer w18: v1(699.01,1037.76) 741,1037.76 ; C15.1 741,1037.76 ; C14.1 741,1037.76
  Bottom Layer w32: C9.1 C10.1 ; C11.1 C10.1 ; v1@1061.65,830.12 1046.09,814.55 C10.1 ; C5.1 C8.1
  other v1: 200,176 200,276 200,376 200,476 200,576 200,676 200,776 200,876 200,976 200,1076 200,1176 200,1276 200,1376
IN/OUT: C12.2 R1.1 Y.1 | length 230.6
  Top Layer w16: v1(746.01,691.76) 746.77,692.53 746.77,703.19 Y.1@792.43,748.85 ; R1.1@792.43,684.96 Y.1@792.43,748.85 ; Y.1@792.43,769.99 Y.1 Y.1@792.43,748.85
  Bottom Layer w16: v1(746.01,691.76) 775.69,721.44 C12.2
NetD1_A: D1.A R2.2 | length 100
  Top Layer w11.8: D1.A R2.2
NetR1_2: R1.2 U2.6 | length 350.4
  Top Layer w11.8: R1.2 851.49,699.28 833.01,717.76 833.01,857.85 843,867.84 U2.6
NRST: C11.2 S1.2 U2.7 | length 579.8
  Top Layer w11.8: v2(903,848) 903.16,848.16 U2.7
  Bottom Layer w11.8: S1.2 789,1189 905.01,1072.99 905.01,961.5 903,959.49 v2(903,848) ; v2@905.01,850.01 907.63,850.01 920.54,862.92 C11.2
OUT/IN: C13.2 U2.5 Y.3 | length 441.8
  Top Layer w10: Y.3 721.57,847.28 752.08,877.79 752.08,889.72 v1(753.99,891.63)
  Top Layer w11.8: Y.3 721.57,895.32 732.01,905.76 849.9,905.76 868.13,887.53 U2.5
  Bottom Layer w10: C13.2 736.32,846.76 737.16,847.61 737.16,873.11 753.99,889.94 v1(753.99,891.63)
PA0: P4.13 R27.2 R28.1 U2.10 | length 1916.5
  Top Layer w11.8: P4.13 135,1338 280.22,1338 R27.2@315.25,1302.97 ; R27.2 421,1301 494,1228 494,767.76 673.76,588 877.89,588 884.8,594.91 884.8,778.99 894.91,789.1 U2.10
  Bottom Layer w11.8: P4.13@98,1299.03 135,1336.03 280.22,1336.03 R28.1
PA1: P4.12 R25.2 R26.1 U2.11 | length 1792.8
  Top Layer w11.8: P4.12 135,1238 280.22,1238 R25.2@315.25,1202.97 ; R25.2@315.25,1200 394,1200 478.2,1115.8 478.2,761.21 667.21,572.2 893.69,572.2 900.6,579.11 900.6,720.66 949.36,769.42 952.02,769.42 U2.11
  Bottom Layer w11.8: P4.12@98,1199.03 135,1236.03 280.22,1236.03 R26.1
PA2: P4.11 R23.2 R24.1 U2.12 | length 1717.9
  Top Layer w11.8: P4.11 135,1138 280.22,1138 R23.2@315.25,1102.97 ; R23.2 395,1101 462.4,1033.6 462.4,754.67 660.67,556.4 909.49,556.4 916.4,563.31 916.4,714.11 952.02,749.73 U2.12
  Bottom Layer w11.8: P4.11@98,1099.03 135,1136.03 280.22,1136.03 R24.1
PA3: P4.10 R21.2 R22.1 U2.13 | length 1613.1
  Top Layer w11.8: P4.10 135,1038 280.22,1038 R21.2@315.25,1002.97 ; R21.2 393,1001 446.6,947.4 446.6,748.12 654.12,540.6 923.6,540.6 1032.73,649.73 1032.73,669.01 U2.13@1032.73,698.55
  Bottom Layer w11.8: P4.10@98,999.03 135,1036.03 280.22,1036.03 R22.1
PA4: P4.9 R19.2 R20.1 U2.14 | length 1556.4
  Top Layer w11.8: P4.9 135,938 280.22,938 R19.2@315.25,902.97 ; R19.2@315.25,898.09 390.91,898.09 430.8,858.2 430.8,741.58 647.58,524.8 930.14,524.8 1052.42,647.07 U2.14
  Bottom Layer w11.8: P4.9@98,899.03 135,936.03 280.22,936.03 R20.1
PA5: P4.8 R17.2 R18.1 U2.15 | length 1514.5
  Top Layer w11.8: P4.8 135,838 280.22,838 R17.2@315.25,802.97 ; R17.2 404.09,801 415,790.09 415,735.03 641.03,509 936.69,509 1072.1,644.41 U2.15
  Bottom Layer w11.8: P4.8@98,799.03 135,836.03 280.22,836.03 R18.1
PA6: P4.7 R15.2 R16.1 U2.16 | length 1475.1
  Top Layer w11.8: P4.7 135,738 280.22,738 R15.2@315.25,702.97 ; R15.2 426.69,701 634.49,493.2 943.23,493.2 1091.79,641.75 U2.16
  Bottom Layer w11.8: P4.7@98,699.03 135,736.03 280.22,736.03 R16.1
PA7: P4.6 R13.2 R14.1 U2.17 | length 1468
  Top Layer w11.8: P4.6 135,638 280.22,638 R13.2@315.25,602.97 ; R13.2 504.34,601 627.94,477.4 949.78,477.4 1111.47,639.09 U2.17
  Bottom Layer w11.8: P4.6@98,599.03 135,636.03 280.22,636.03 R14.1
PA8: P5.5 R39.2 R40.1 U2.29 | length 1197
  Top Layer w11.8: U2.29 1452.68,828.47 1783.15,498 R39.2 1820.54,499.97 1834.32,513.75 1836.29,513.75 1857.54,535 2024,535 P5.5
  Bottom Layer w11.8: R40.1 1820.54,499.97 1850.12,529.55 1996.45,529.55 2017.53,508.47 2050.53,508.47 P5.5
PA9: P5.6 R41.2 R42.1 U2.30 | length 1162.9
  Top Layer w11.8: U2.30 1455.34,848.16 1705.5,598 R41.2 1820.54,599.97 1854.57,634 2023,634 2059,598 P5.6
  Bottom Layer w11.8: R42.1 1820.54,599.97 1850.12,629.55 1996.45,629.55 2017.53,608.47 2050.53,608.47 P5.6
PA10: P5.7 R43.2 R44.1 U2.31 | length 1128.8
  Top Layer w11.8: U2.31 1458,867.84 1627.84,698 R43.2 1820.54,699.97 1853.57,733 2017,733 2052,698 P5.7
  Bottom Layer w11.8: R44.1 1820.54,699.97 1850.12,729.55 1996.45,729.55 2017.53,708.47 2050.53,708.47 P5.7
PA11: P5.8 R45.2 R46.1 U2.32 | length 1094.7
  Top Layer w11.8: U2.32 1460.66,887.53 1550.18,798 R45.2 1820.54,799.97 1852.57,832 2017.47,832 2051.47,798 P5.8
  Bottom Layer w11.8: R46.1 1820.54,799.97 1850.12,829.55 1996.45,829.55 2017.53,808.47 2050.53,808.47 P5.8
PA12: P5.9 R47.2 R48.1 U2.33 | length 1097.9
  Top Layer w11.8: U2.33 1465.79,907.21 1516,857 1779.54,857 R47.2 1820.54,899.97 1834.32,913.75 1836.29,913.75 1857.54,935 2024,935 P5.9
  Bottom Layer w11.8: R48.1 1820.54,899.97 1850.12,929.55 1996.45,929.55 2017.53,908.47 2050.53,908.47 P5.9
PA13: P5.10 R49.2 R50.1 U2.34 | length 1089.1
  Top Layer w11.8: U2.34 1706.9,926.9 1778,998 R49.2 1820.54,999.97 1853.57,1033 2028,1033 2061,1000 P5.10
  Bottom Layer w11.8: R50.1 1820.54,999.97 1850.12,1029.55 1996.45,1029.55 2017.53,1008.47 2050.53,1008.47 P5.10
PB0: P4.5 R11.2 R12.1 U2.18 | length 1460.9
  Top Layer w11.8: P4.5 135,538 280.22,538 R11.2@315.25,502.97 ; R11.2 582,501 621.4,461.6 956.32,461.6 1131.16,636.43 U2.18
  Bottom Layer w11.8: P4.5@98,499.03 135,536.03 280.22,536.03 R12.1
PB1: P4.4 R9.2 R10.1 U2.19 | length 1491
  Top Layer w11.8: P4.4 135,438 280.22,438 R9.2@315.25,402.97 ; R9.2 918.07,401 1150.84,633.78 U2.19
  Bottom Layer w11.8: P4.4@98,399.03 135,436.03 280.22,436.03 R10.1
PB2: P4.3 R7.2 R8.1 U2.20 | length 1553.6
  Top Layer w11.8: P4.3 135,338 280.22,338 R7.2@315.25,302.97 ; R7.2 840.41,301 1170.53,631.12 U2.20
  Bottom Layer w11.8: P4.3@98,299.03 135,336.03 280.22,336.03 R8.1
PB3: P5.11 R51.2 R52.1 U2.39 | length 1434.2
  Top Layer w11.8: U2.39 1209.9,1153.18 1360.72,1304 1567,1304 1773,1098 R51.2 1820.54,1099.97 1834.32,1113.75 1836.29,1113.75 1857.54,1135 2024,1135 P5.11
  Bottom Layer w11.8: R52.1 1820.54,1099.97 1850.12,1129.55 1996.45,1129.55 2017.53,1108.47 2050.53,1108.47 P5.11
PB4: P5.12 R53.2 R54.1 U2.40 | length 1427.1
  Top Layer w11.8: U2.40 1190.21,1155.83 1354.18,1319.8 1573.54,1319.8 1695.34,1198 R53.2 1820.54,1199.97 1834.32,1213.75 1836.29,1213.75 1857.54,1235 2024,1235 P5.12
  Bottom Layer w11.8: R54.1 1820.54,1199.97 1850.12,1229.55 1996.45,1229.55 2017.53,1208.47 2050.53,1208.47 P5.12
PB5: P5.13 R55.2 R56.1 U2.41 | length 1420
  Top Layer w11.8: U2.41 1170.53,1158.49 1347.63,1335.6 1580.09,1335.6 1617.69,1298 R55.2 1820.54,1299.97 1834.32,1313.75 1836.29,1313.75 1857.54,1335 2024,1335 P5.13
  Bottom Layer w11.8: R56.1 1820.54,1299.97 1850.12,1329.55 1996.45,1329.55 2017.53,1308.47 2050.53,1308.47 P5.13
PB6: P5.14 R57.2 R58.1 U2.42 | length 1451.5
  Top Layer w11.8: U2.42 1150.84,1161.15 1387.69,1398 R57.2 1820.54,1399.97 1834.32,1413.75 1836.29,1413.75 1857.54,1435 2024,1435 P5.14
  Bottom Layer w11.8: R58.1 1820.54,1399.97 1850.12,1429.55 1996.45,1429.55 2017.53,1408.47 2050.53,1408.47 P5.14
PB7: P5.15 R59.2 R60.1 U2.43 | length 1509.7
  Top Layer w11.8: U2.43 1131.16,1163.81 1465.34,1498 R59.2 1820.54,1499.97 1850.12,1529.55 2020.45,1529.55 2052,1498 P5.15
  Bottom Layer w11.8: R60.1 1820.54,1499.97 1850.12,1529.55 1996.45,1529.55 2017.53,1508.47 2050.53,1508.47 P5.15
PB8: P5.16 R61.2 R62.1 U2.45 | length 1586.6
  Top Layer w11.8: U2.45 1091.79,1087.9 1091.36,1088.33 1091.36,1146.36 1544,1599 R61.2@1820.54,1599 ; R61.2 R61.2@1820.54,1599 ; P5.16 2053.5,1598 2015.5,1636 1856.57,1636 1820.54,1599.97 R61.2@1820.54,1599
  Bottom Layer w11.8: R62.1 1820.54,1599.97 1850.12,1629.55 1996.45,1629.55 2017.53,1608.47 2050.53,1608.47 P5.16
PB9: P4.14 R29.2 R30.1 U2.46 | length 1468.5
  Top Layer w11.8: P4.14 135,1438 280.22,1438 315.25,1402.97 R29.2 ; R29.2@315.25,1400 431,1400 654.89,1176.11 1010.89,1176.11 1072.1,1114.9 U2.46
  Bottom Layer w11.8: P4.14@98,1399.03 135,1436.03 280.22,1436.03 R30.1
PB10: P4.2 R5.2 R6.1 U2.21 | length 1616.3
  Top Layer w11.8: P4.2 135,238 280.22,238 R5.2@315.25,202.97 ; R5.2 762.76,201 1190.21,628.46 U2.21
  Bottom Layer w11.8: P4.2@98,199.03 135,236.03 280.22,236.03 R6.1
PB11: P4.1 R3.2 R4.1 U2.22 | length 1680.9
  Top Layer w11.8: P4.1 135,138 280.22,138 315.25,102.97 R3.2 685.1,101 1209.9,625.8 U2.22
  Bottom Layer w11.8: P4.1@98,99.03 135,136.03 280.22,136.03 R4.1
PB12: P5.1 R31.2 R32.1 U2.25 | length 1525
  Top Layer w11.8: U2.25 1439.27,749.73 1658,531 1658,194 1754,98 R31.2 1820.54,99.97 1852.57,132 2024,132 2058,98 P5.1
  Bottom Layer w11.8: R32.1 1820.54,99.97 1850.12,129.55 1996.45,129.55 2017.53,108.47 2050.53,108.47 P5.1
PB13: P5.2 R33.2 R34.1 U2.26 | length 1446.5
  Top Layer w11.8: U2.26 1441.93,769.42 1675.8,535.54 1675.8,277.2 1755,198 R33.2 1820.54,199.97 1853.57,233 2026,233 P5.2
  Bottom Layer w11.8: R34.1 1820.54,199.97 1850.12,229.55 1996.45,229.55 2017.53,208.47 2050.53,208.47 P5.2
PB14: P5.3 R35.2 R36.1 U2.27 | length 1370.1
  Top Layer w11.8: U2.27 1444.59,789.1 1691.6,542.09 1691.6,357.4 1751,298 R35.2 1820.54,299.97 1853.57,333 2019,333 2054,298 P5.3
  Bottom Layer w11.8: R36.1 1820.54,299.97 1850.12,329.55 1996.45,329.55 2017.53,308.47 2050.53,308.47 P5.3
PB15: P5.4 R37.2 R38.1 U2.28 | length 1291.8
  Top Layer w11.8: U2.28 1447.25,808.79 1707.4,548.63 1707.4,443.6 1753,398 R37.2 1820.54,399.97 1834.32,413.75 1836.29,413.75 1857.54,435 2024,435 P5.4
  Bottom Layer w11.8: R38.1 1820.54,399.97 1850.12,429.55 1996.45,429.55 2017.53,408.47 2050.53,408.47 P5.4
SWCLK: P3.3 U2.38 | length 253
  Top Layer w11.8: U2.38 1229.58,1110.56 1250.65,1131.63 1302.99,1131.63 P3.3
SWDIO: P3.2 U2.37 | length 281.7
  Top Layer w11.8: U2.37 1249.27,1107.72 1256.18,1114.63 1335.99,1114.63 P3.2
pads on no net: U2.2

## Polygon pours and split planes (outlines as drawn)
GND on Bottom Layer "GND_L04_P001" (solid, remove dead copper, pour order 1): 0,0 2169,0 2169,1773 0,1773
GND on Top Layer "GND_L01_P000" (solid, remove dead copper, pour order 0): 0,0 2169,0 2169,1773 0,1773
GND on GND layer (split plane): 2148.9,20.1 20.1,20.1 20.1,1752.9 2148.9,1752.9
+3.3V on 3.3V layer (split plane): 2148.9,20.1 20.1,20.1 20.1,1752.9 2148.9,1752.9

## Keep-outs
Keep-Out Layer:
  the board outline again, w50

## Silkscreen, mask and mechanical layers (free items; w line width, h text height)
Top Overlay:
  text "GND" at 374,1715.52 h40
  text "PB8" at 1827.06,1638.42 h30
  text "PB7" at 1827.06,1537 h30
  text "PB9" at 257,1444.36 h30
  text "9V" at 377,1437.48 h40
  text "PB6" at 1827.06,1437.39 h30
  text "PA0" at 257,1342.39 h30
  text "PB5" at 1827.06,1337.39 h30
  text "PA1" at 257,1243 h30
  text "GND" at 1322.48,1240 h40 r90
  text "SWCLK" at 1373.52,1240 h40 r90
  text "SWDIO" at 1422.48,1240 h40 r90
  text "3.3V" at 1472.48,1240 h40 r90
  text "PB4" at 1827.06,1237.06 h30
  text "GND" at 1127.48,1212 h40 r90
  text "NRST" at 688.56,1209 h40 r90
  text "PA2" at 257,1141 h30
  text "PB3" at 1827.06,1137.39 h30
  text "3.3V" at 1557,1071.52 h40
  text "PA3" at 257,1042.39 h30
  text "PA13" at 1827.06,1037.39 h30
  text "Boot0" at 1557,1020.56 h40
  text "GND" at 1556,965.52 h40
  text "PA4" at 257,942.06 h30
  text "PA12" at 1827.06,937 h30
  text "PA5" at 257,842.39 h30
  text "PA11" at 1827.06,837 h30
  text "PA6" at 257,743.39 h30
  text "PA10" at 1827.06,737.39 h30
  text "PA7" at 257,643 h30
  text "PA9" at 1827.06,637.36 h30
  text "PB0" at 257,542.39 h30
  text "PA8" at 1827.06,537.42 h30
  text "PB1" at 257,443 h30
  text "PB15" at 1827.06,437.39 h30
  text "PB2" at 257,342 h30
  text "PB14" at 1827.06,339.06 h30
  text "PB10" at 257,242.39 h30
  text "PB13" at 1827.06,237.39 h30
  text "PB11" at 257,142 h30
  text "PB12" at 1827.06,137 h30